# Altium PCB Programmer.PcbDoc
Units mm, origin at the board's own origin, x right, y up, seen from the top; angles counter-clockwise.
Board outline 14.6 x 12.7 mm, 2 copper layers (Top Layer, Bottom Layer), stack 1.571 mm thick; 14 components, 12 nets, 36 pads, 0 vias.
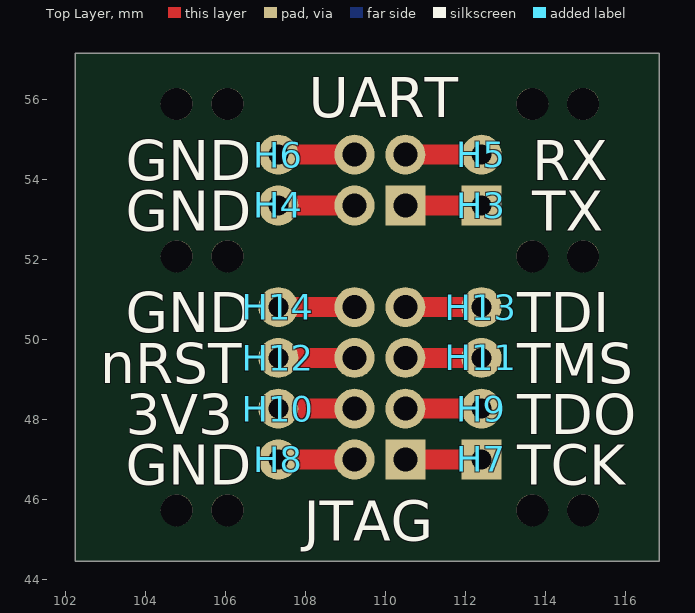
[diagram p0: Top Layer view]
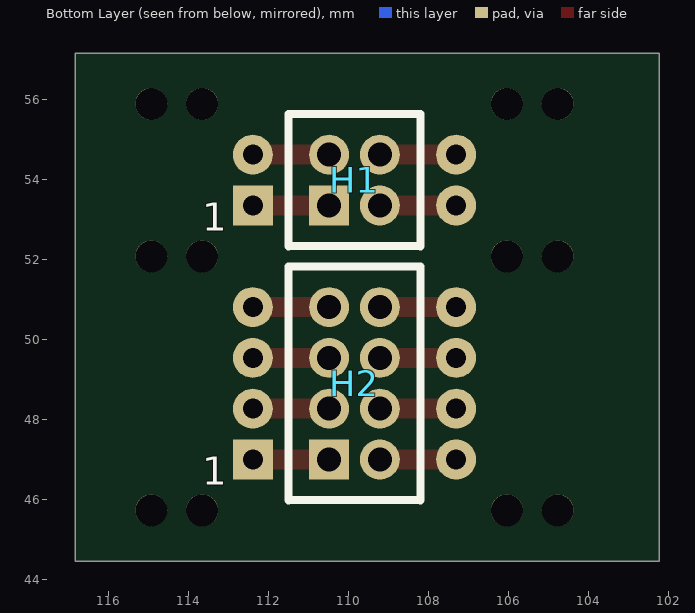
[diagram p1: Bottom Layer view, seen from below]

## Layer stack, top to bottom
Top Solder: solder mask 0.0102, Solder Resist, Dk 3.5
Top Layer: signal copper 0.0356
Dielectric 1: dielectric 1.5, FR-4, Dk 4.8
Bottom Layer: signal copper 0.0356
Bottom Solder: solder mask 0.0102, Solder Resist, Dk 3.5

## Board outline
102.235,44.45 102.235,57.15 116.84,57.15 116.84,44.45

## Design rules (kind name [scope] priority, off if disabled: settings)
Clearance [All] p1: gap=0.254 ignorepadtopadclearanceinfootprint=FALSE except(0: Arc-Hole Track-Hole SMDPad-Hole THPad-Hole Via-Hole Fill-Hole Poly-Hole Region-Hole Text-Hole)
PolygonConnect [All] p1: connectstyle=Relief reliefconductorwidth=0.254 reliefentries=4 polygonreliefangle="90 Angle" airgapwidth=0.254
RoomDefinition Programmer [InComponentClass('Programmer')] p1: confinementstyle=ConfineIn formatcopy=TRUE lockcomponents=FALSE outline 102.235,57.15 116.84,57.15 116.84,44.45 102.235,44.45
RoutingVias [All] p1: holewidth=0.711 width=1.27 viastyle="Through Hole" minholewidth=0.711 minwidth=1.27 maxholewidth=0.711 maxwidth=1.27
SolderMaskExpansion [All] p1: expansion=0.102
Width [All] p1: maxlimit=1 minlimit=0.254 preferedwidth=0.254 minimp=50.000000 maximp=50.000000 favimp=50.000000
30 further rules are at their usual default settings.

## Components (designator, comment, footprint, x,y, rotation, side; value= is the part's Value field where it differs from the comment)
H1 "UART" Connfly_DS1065-03-2X2 110.49,53.34 r90 bottom
H2 "JTAG" Connfly_DS1065-03-2X4 110.49,46.99 r90 bottom
H3 "TX" Wire_AWG-30#1 112.395,53.34 r0 top
H4 "GND" Wire_AWG-30#2 107.315,53.34 r0 top
H5 "RX" Wire_AWG-30#2 112.395,54.61 r0 top
H6 "GND" Wire_AWG-30#2 107.315,54.61 r0 top
H7 "TCK" Wire_AWG-30#1 112.395,46.99 r0 top
H8 "GND" Wire_AWG-30#2 107.315,46.99 r0 top
H9 "TDO" Wire_AWG-30#2 112.395,48.26 r0 top
H10 "3V3" Wire_AWG-30#2 107.315,48.26 r90 top
H11 "TMS" Wire_AWG-30#2 112.395,49.53 r90 top
H12 "nRST" Wire_AWG-30#2 107.315,49.53 r90 top
H13 "TDI" Wire_AWG-30#2 112.395,50.8 r90 top
H14 "GND" Wire_AWG-30#2 107.315,50.8 r90 top

## Footprints (in the part's own frame and the unit in brackets; to place one, negate y for a bottom-side part, rotate by r counter-clockwise, add the part's x,y. Pads: shape width x height; smd on the part's side, far side on the other; paste and mask are expansions set on the pad)
Connfly_DS1065-03-2X2 [mm] "Connfly, female, 1.27mm, 2x2pin, THT, vertical"
  rect 1x1 hole 0.6: 1(0,0)
  round 1 hole 0.6: 2(0,-1.27) 3(1.27,0) 4(1.27,-1.27)
  silkscreen extent -1.02,-2.29 2.29,1.02, body extent -0.88,-2.18 2.16,0.92, height 4.4
Connfly_DS1065-03-2X4 [mm] "Connfly, female, 1.27mm, 2x4pin, THT, vertical"
  rect 1x1 hole 0.6: 1(0,0)
  round 1 hole 0.6: 2(0,-1.27) 3(1.27,0) 4(1.27,-1.27) 5(2.54,0) 6(2.54,-1.27) 7(3.81,0) 8(3.81,-1.27)
  silkscreen extent -1.02,-2.29 4.83,1.02, body extent -0.88,-2.18 4.7,0.92, height 4.4
Wire_AWG-30#1 [mm] "An AWG-30 wire with no stress relief."
  rect 1x1 hole 0.5: 1(0,0)
Wire_AWG-30#2 [mm] "An AWG-30 wire with no stress relief."
  round 1 hole 0.5: 1(0,0)

## Part data
H1: library part "Header 2X2", "Header, 2-Pin, Dual row", LatestRevisionDate=17-Jul-2002, LatestRevisionNote="Re-released for DXP Platform.", Publisher="Altium Limited"
H2: library part "Header 4X2", "Header, 4-Pin, Dual row", LatestRevisionDate=17-Jul-2002, LatestRevisionNote="Re-released for DXP Platform.", Publisher="Altium Limited"
H3 H4 H5 H6 H7 H8 H9 H10 H11 H12 H13 H14: library part Wire_AWG-30, "An AWG-30 wire solder point."

## Free pads (board coordinates)
  round 0.8 hole 0.8 unplated: 21(106.045,55.88) 21(113.665,55.88) 22(104.775,55.88) 22(114.935,55.88) 23(106.045,52.07) 23(113.665,52.07) 24(104.775,52.07) 24(114.935,52.07) 25(104.775,45.72) 25(114.935,45.72) 26(106.045,45.72) 26(113.665,45.72)

## Nets (pads, with @x,y where several pads share a name; then routed paths per layer and width w, separated by ;. In a path a pad name is that pad's centre, name@x,y a point inside that pad or via, vN(x,y) a via of type N, cw(c..) or ccw(c..) an arc to the next point about the centre after c; other vN are vias at no path point)
NetH1_1: H1.1 H3.1 | length 1.9
  Top Layer w0.5: H1.1 H3.1
NetH1_2: H1.2 H4.1 | length 1.9
  Top Layer w0.5: H4.1 H1.2
NetH1_3: H1.3 H5.1 | length 1.9
  Top Layer w0.5: H1.3 H5.1
NetH1_4: H1.4 H6.1 | length 1.9
  Top Layer w0.5: H6.1 H1.4
NetH2_1: H2.1 H7.1 | length 1.9
  Top Layer w0.5: H2.1 H7.1
NetH2_2: H2.2 H8.1 | length 1.9
  Top Layer w0.5: H8.1 H2.2
NetH2_3: H2.3 H9.1 | length 1.9
  Top Layer w0.5: H2.3 H9.1
NetH2_4: H2.4 H10.1 | length 1.9
  Top Layer w0.5: H10.1 H2.4
NetH2_5: H2.5 H11.1 | length 1.9
  Top Layer w0.5: H2.5 H11.1
NetH2_6: H2.6 H12.1 | length 1.9
  Top Layer w0.5: H12.1 H2.6
NetH2_7: H2.7 H13.1 | length 1.9
  Top Layer w0.5: H2.7 H13.1
NetH2_8: H2.8 H14.1 | length 1.9
  Top Layer w0.5: H14.1 H2.8

## Silkscreen, mask and mechanical layers (free items; w line width, h text height)
Mechanical 1:
  the board outline again, w0.208

## Text inside footprints (layer, text, board x,y; h text height)
H1: Bottom Overlay "1" at 113.665,52.705 h0.7
H2: Bottom Overlay "1" at 113.665,46.355 h0.7